# EAGLE board drums (EAGLE 8.3.1)
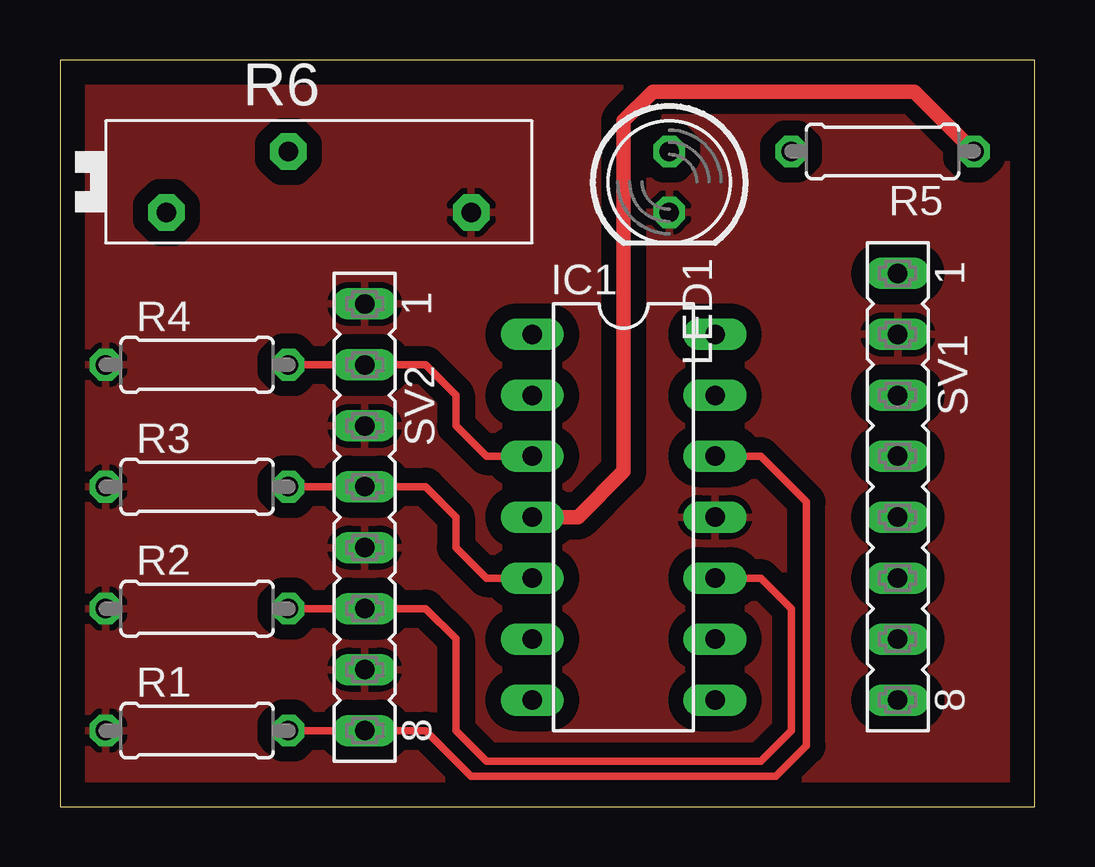
[diagram p0: board, top side]
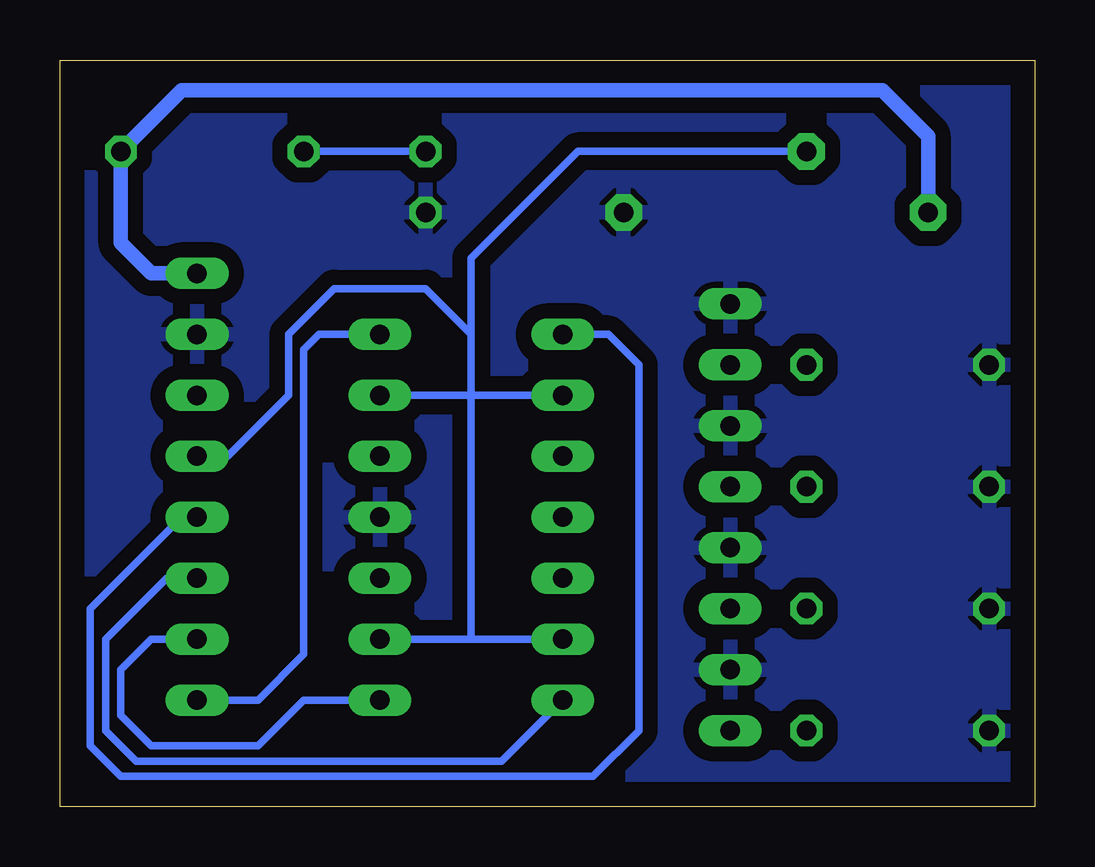
[diagram p1: board, bottom side, seen from below]

Size 40.64 x 31.11 mm. Coordinates in mm from the lower left corner, seen from the top.
Outline: 0,0 40.64,0 40.64,31.11 0,31.11 0,0
Copper layers (1*16): Top 0.035mm / dielectric 1.5mm / Bottom 0.035mm
Design rules "default": minimum track width 6mil, minimum drill 0.35mm, track to track 6mil, track to pad 6mil, pad to pad 6mil, via to via 6mil, smd to smd 6mil, copper to edge 40mil, drill to drill 6mil, minimum pad ring 10mil, minimum via ring 8mil, stop-mask expansion 4mil, vias tented up to drill 0mil, thermal gap 10mil

## Footprints (pad centres in the part's own frame; a part is rotated, then mirrored left to right if it is on the bottom)
DIL14 = drill 0.813 long: 1 -7.62,-3.81; 2 -5.08,-3.81; 3 -2.54,-3.81; 4 0,-3.81; 5 2.54,-3.81; 6 5.08,-3.81; 7 7.62,-3.81; 8 7.62,3.81; 9 5.08,3.81; 10 2.54,3.81; 11 0,3.81; 12 -2.54,3.81; 13 -5.08,3.81; 14 -7.62,3.81
LED5MM = drill 0.813 octagon: A -1.27,0; K 1.27,0
0207/7 = drill 0.813 octagon: 1 -3.81,0; 2 3.81,0
PT-SPIN = drill 0.813 pad 1.524 octagon: 1 -6.35,-1.27; 2 6.35,-1.27; 3 -1.27,1.27
FE08 = drill 0.813 long: 1 -8.89,0; 2 -6.35,0; 3 -3.81,0; 4 -1.27,0; 5 1.27,0; 6 3.81,0; 7 6.35,0; 8 8.89,0

## Placement (x,y rotation side)
IC1  ICL7641P  [DIL14]  23.49,12.07 270 top
LED1  [LED5MM]  25.4,26.04 270 top
R1  [0207/7]  5.71,3.18 0 top
R2  [0207/7]  5.71,8.25 0 top
R3  [0207/7]  5.71,13.33 0 top
R4  [0207/7]  5.71,18.41 0 top
R5  [0207/7]  34.29,27.3 180 top
R6  [PT-SPIN]  10.79,26.04 0 top
SV1  [FE08]  34.92,13.33 270 top
SV2  [FE08]  12.7,12.07 270 top

## Library data of the parts
IC1 = linear
LED1 = led
R1-R6 = rcl
SV1 SV2 = con-lsta; OC_FARNELL: unknown; OC_NEWARK: unknown

## Nets
B1: IC1.1 SV1.5
B2: IC1.7 SV1.6
B3: IC1.8 SV1.7
B4: IC1.14 SV1.8
D1: IC1.3 R4.2 SV2.2
D2: IC1.5 R3.2 SV2.4
D3: IC1.10 R2.2 SV2.6
D4: IC1.12 R1.2 SV2.8
GND: IC1.11 LED1.K R1.1 R2.1 R3.1 R4.1 R6.2 SV1.2 SV2.1 SV2.3 SV2.5 SV2.7
N$2: LED1.A R5.2
VCC: IC1.4 R5.1 R6.1 SV1.1
VREF: IC1.2 IC1.6 IC1.9 IC1.13 R6.3 SV1.4

## Tracks (layer width: path | path; a pad name or v marks a point on that pad's centre or on a via)
B1
  Bottom 0.305: SV1.5 35.56,12.07 39.37,8.25 39.37,2.54 38.1,1.27 18.41,1.27 16.51,3.18 16.51,18.41 17.78,19.68 IC1.1
B2
  Bottom 0.305: SV1.6 36.2,9.53 38.73,6.98 38.73,3.18 37.46,1.9 22.23,1.9 IC1.7
B3
  Bottom 0.305: SV1.7 36.83,6.98 38.1,5.71 38.1,3.81 36.83,2.54 32.38,2.54 30.48,4.45 IC1.8
B4
  Bottom 0.305: SV1.8 32.38,4.45 30.48,6.35 30.48,19.05 29.84,19.68 IC1.14
D1
  Top 0.305: R4.2 SV2.2 15.24,18.41 16.51,17.14 16.51,15.87 17.78,14.61 IC1.3
D2
  Top 0.305: R3.2 SV2.4 15.24,13.33 16.51,12.07 16.51,10.79 17.78,9.53 IC1.5
D3
  Top 0.305: R2.2 SV2.6 15.25,8.25 16.51,6.99 16.51,3.18 17.78,1.9 29.21,1.9 30.48,3.18 30.48,8.25 29.21,9.53 IC1.10
D4
  Top 0.305: R1.2 SV2.8 15.24,3.18 17.14,1.27 29.84,1.27 31.12,2.54 31.12,12.7 29.21,14.61 IC1.12
GND
  pour Bottom (isolate 0.635): 0,31.11 0,0 40.64,0 40.64,31.11
  pour Top (isolate 0.635): 0,31.11 0,0 40.64,0 40.64,31.11
N$2
  Bottom 0.305: R5.2 LED1.A
VCC
  Top 0.61: R5.1 35.61,29.79 24.71,29.79 23.49,28.57 23.49,13.97 21.59,12.07 IC1.4
  Bottom 0.61: SV1.1 36.83,22.22 38.1,23.5 R5.1 35.56,29.85 6.35,29.85 4.45,27.94 R6.1
VREF
  Bottom 0.305: SV1.4 33.66,14.61 31.12,17.14 31.12,19.68 29.21,21.59 25.4,21.59 23.49,19.68 | 23.49,19.68 23.49,17.26 | 23.49,17.02 23.49,17.26 | 23.49,17.02 23.49,6.98 | 23.49,6.98 IC1.9 | 23.49,6.98 IC1.6 | IC1.2 23.38,17.14 23.49,17.26 | IC1.13 23.62,17.14 23.49,17.02 | R6.3 19.05,27.3 23.49,22.86 23.49,19.68